# Altium PCB MCU_BOARD.PcbDoc
Units mil, origin at the board's own origin, x right, y up, seen from the top; angles counter-clockwise.
Board outline 1405 x 1170 mil, 2 copper layers (Top Layer, Bottom Layer); 32 components, 95 nets, 105 pads, 3 vias.
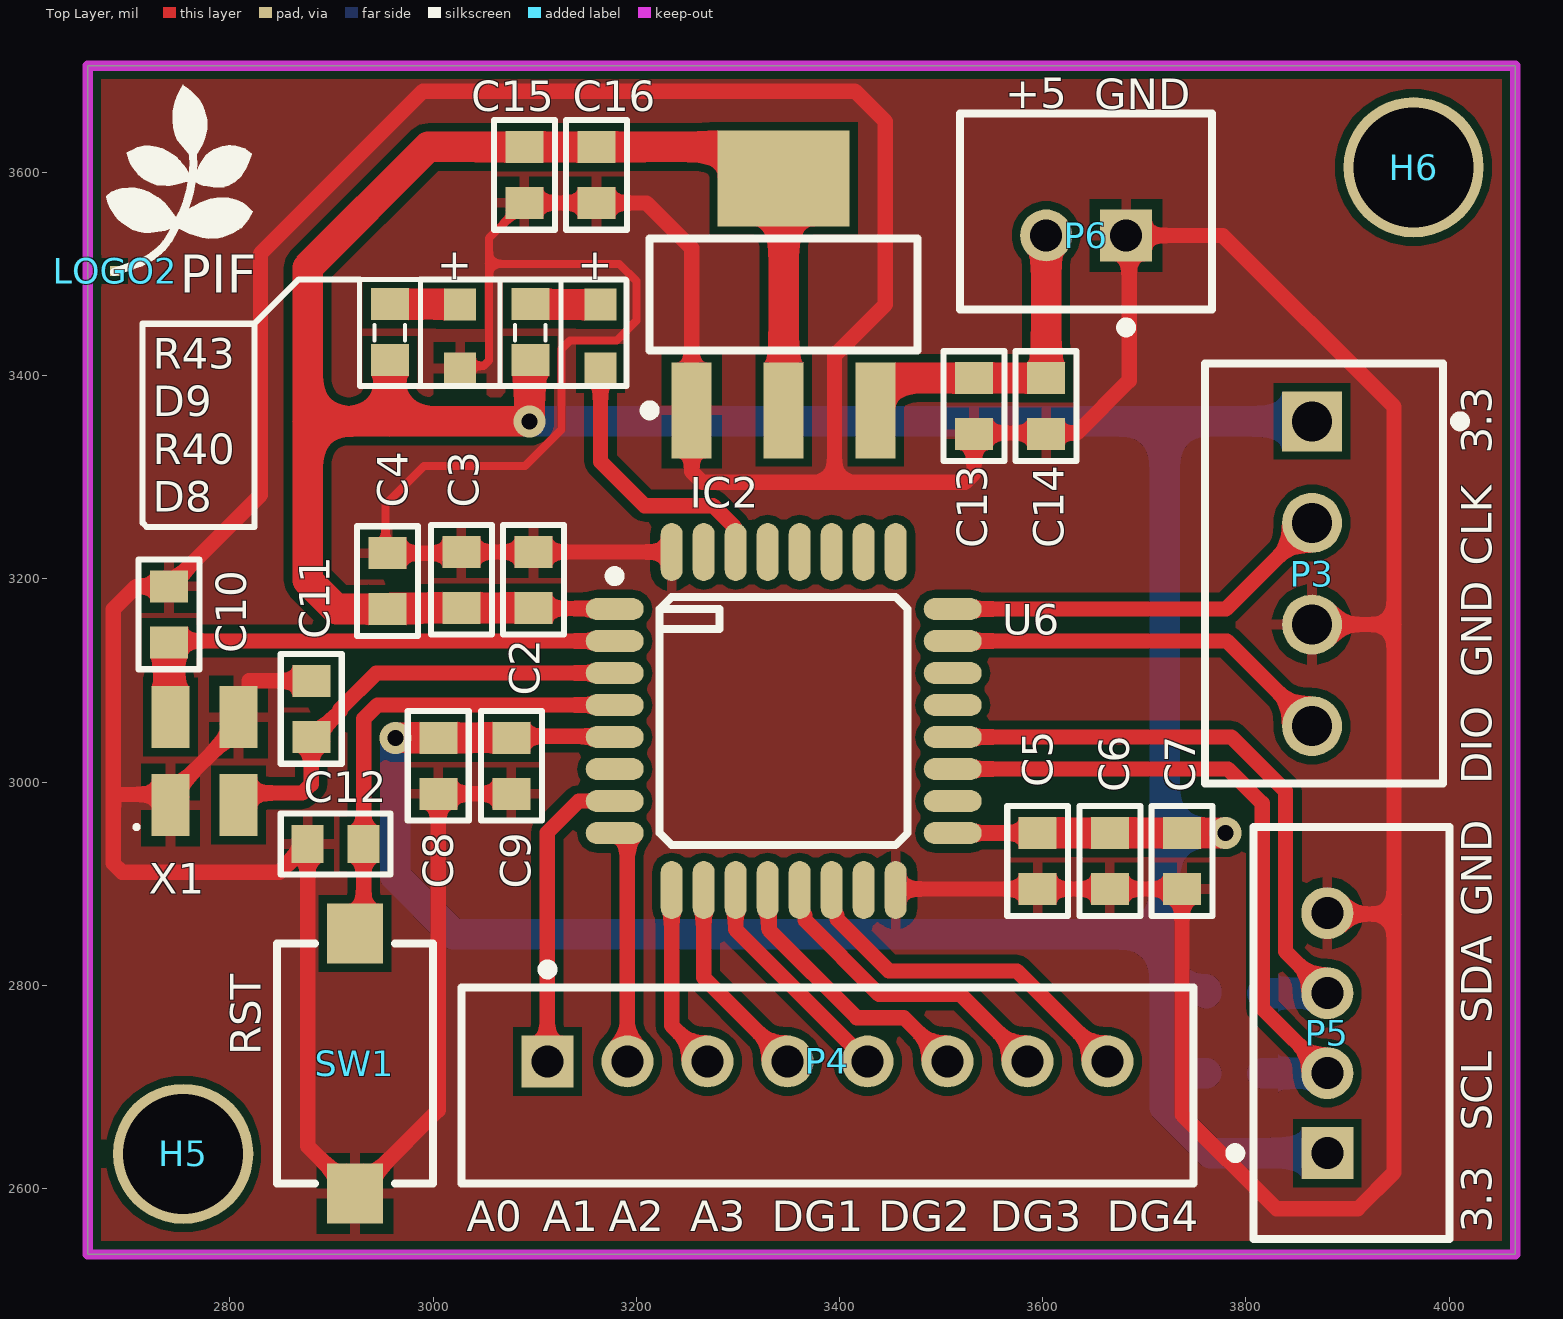
[diagram p0: Top Layer view]
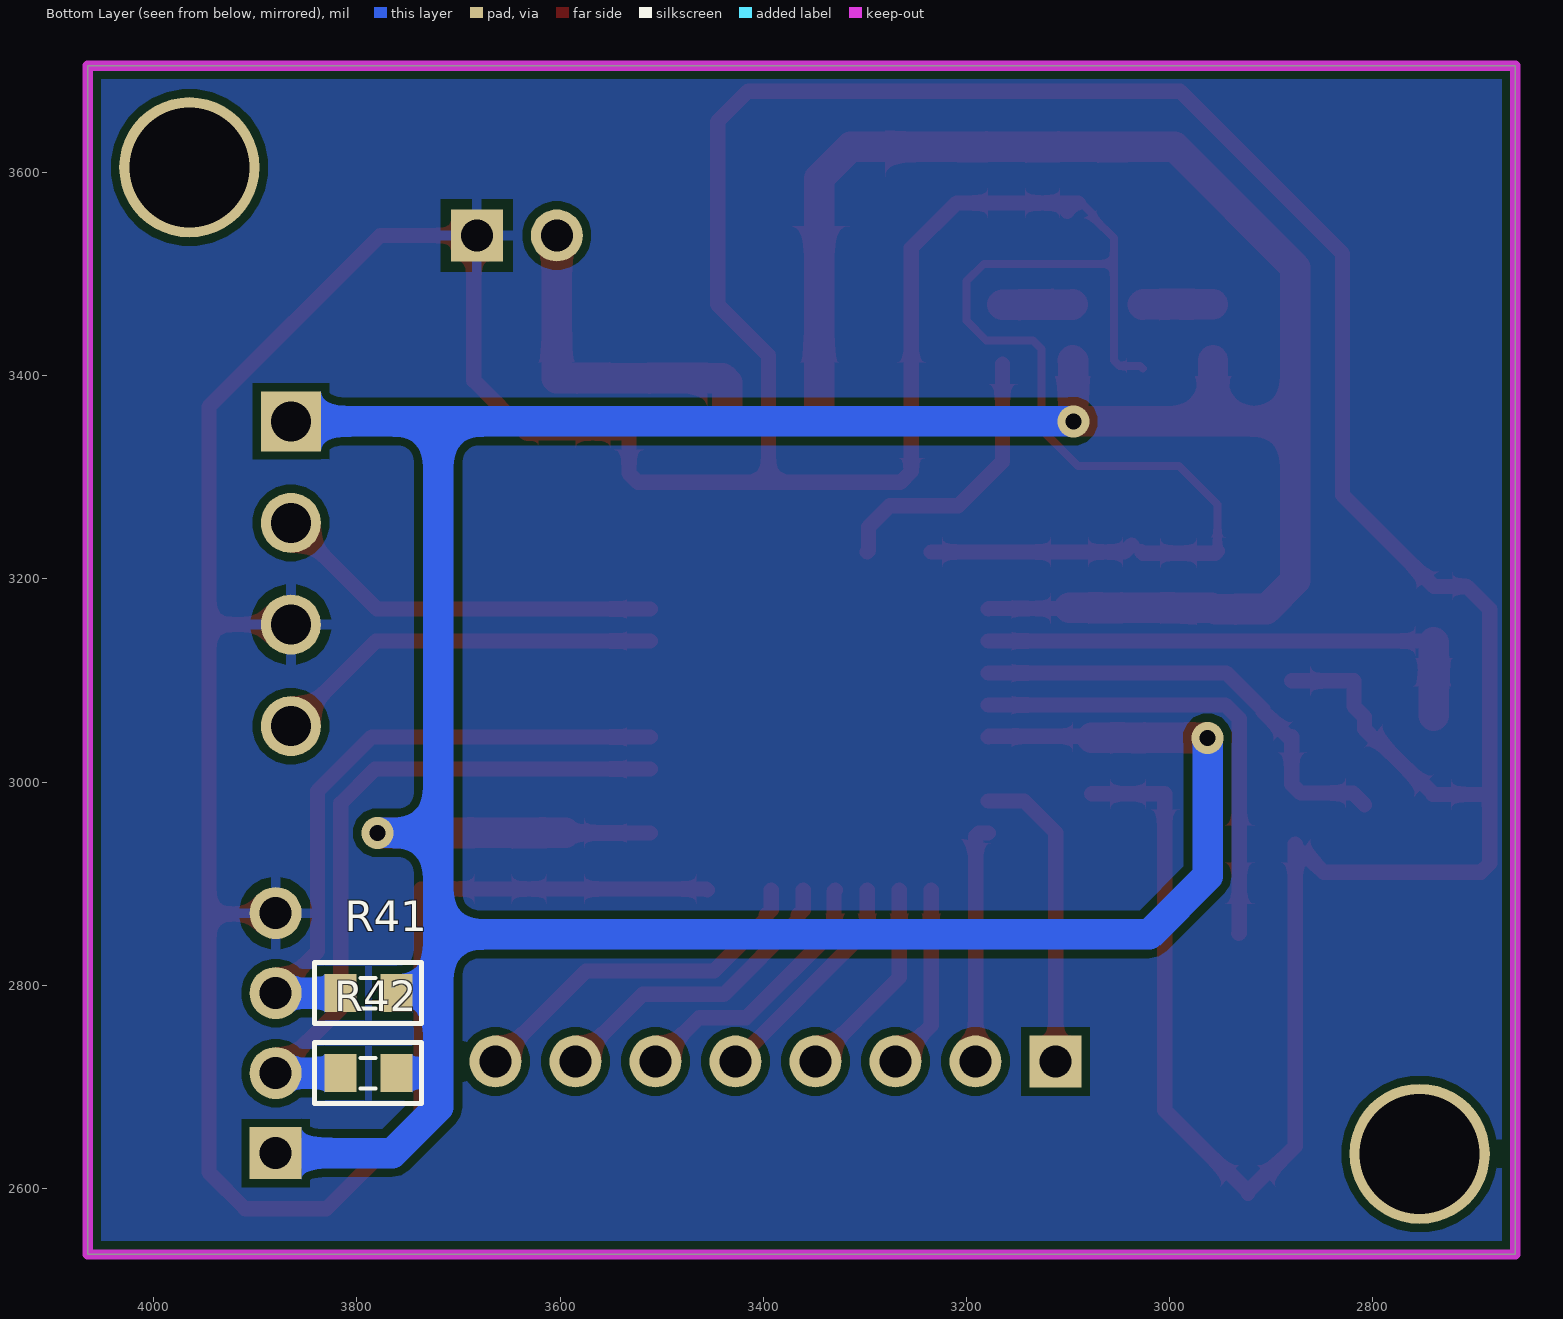
[diagram p1: Bottom Layer view, seen from below]

## Layer stack, top to bottom
Top Solder: solder mask 0.4, Solder Resist, Dk 3.5
Top Layer: signal copper 1.4
Dielectric 1: dielectric 12.6, FR-4, Dk 4.8
Bottom Layer: signal copper 1.4
Bottom Solder: solder mask 0.4, Solder Resist, Dk 3.5

## Board outline
2660,2535 4065,2535 4065,3705 2660,3705

## Design rules (kind name [scope] priority, off if disabled: settings)
Clearance [All] p1: gap=8 ignorepadtopadclearanceinfootprint=FALSE
PolygonConnect [All] p1: connectstyle=Relief reliefconductorwidth=10 reliefentries=4 polygonreliefangle="90 Angle" airgapwidth=10
RoutingVias [All] p1: holewidth=15.75 width=31.5 viastyle="Through Hole" minholewidth=15.75 minwidth=31.5 maxholewidth=15.75 maxwidth=31.5
SolderMaskExpansion [All] p1: expansion=4 istentingtop=FALSE
Width [All] p1: maxlimit=30 minlimit=8 preferedwidth=15
30 further rules are at their usual default settings.

## Components (designator, comment, footprint, x,y, rotation, side; value= is the part's Value field where it differs from the comment)
C2 "Cap Non-Pol SMD" CAP-SM-0603 3098.77,3199 r270 top value="100nF, 16V"
C3 "Cap Non-Pol SMD" CAP-SM-0603 3027.74,3199 r270 top value="100nF, 16V"
C4 "Cap Non-Pol SMD" CAP-SM-0603 2955,3197.7 r270 top value="4.7uF, 16V"
C5 "Cap Non-Pol SMD" CAP-SM-0603 3595,2922.28 r90 top value="100nF, 16V"
C6 "Cap Non-Pol SMD" CAP-SM-0603 3666.03,2922.28 r90 top value="100nF, 16V"
C7 "Cap Non-Pol SMD" CAP-SM-0603 3737.07,2922.28 r90 top value="4.7uF, 16V"
C8 "Cap Non-Pol SMD" CAP-SM-0603 3005,3016 r90 top value="10nF, 16V"
C9 "Cap Non-Pol SMD" CAP-SM-0603 3077,3016 r90 top value="1uF, 16V"
C10 "Cap Non-Pol SMD" CAP-SM-0603 2740,3165 r270 top value="10pF, 16V"
C11 "Cap Non-Pol SMD" CAP-SM-0603 2880.02,3072 r270 top value="10pF, 16V"
C12 "Cap Non-Pol SMD" CAP-SM-0603 2904.02,2939 r0 top value="100nF, 16V"
C13 "Cap Non-Pol SMD" CAP-SM-0603 3532.28,3370 r90 top value="1uF, 16V"
C14 "Cap Non-Pol SMD" CAP-SM-0603 3603.32,3370 r90 top value="100nF, 16V"
C15 "Cap Non-Pol SMD" CAP-SM-0603 3089.74,3597.56 r90 top value="100nF, 16V"
C16 "Cap Non-Pol SMD" CAP-SM-0603 3160.78,3597.56 r90 top value="1uF, 16V"
D8 "Yellow, 2V" WL-SMCW_0603_H=0.7mm 3164.71,3438.46 r90 top
D9 "Yellow, 2V" WL-SMCW_0603_H=0.7mm 3026.54,3438.46 r90 top
H5 "Hole" "LO KHOAN 3MM" 2754,2634 r0 top
H6 "Hole" "LO KHOAN 3MM" 3965,3605 r0 top
IC2 "LM1117" SOT223-4N 3345,3480 r90 top
LOGO2 "LOGO PIF" "PIF LOGO SMALL SSTOP" 2877,3691 r0 top
P3 "61900411121" 61900411121 3876.81,3205 r90 top
P4 "62000811622" 62000811622 3388.11,2701.38 r180 top
P5 "62000411622" 62000411622 3903.62,2752.82 r270 top
P6 "62000211622" 62000211622 3642.69,3561.56 r0 top
R40 "RESISTOR SMD" RES-SM-0603 3095.63,3469.72 r270 top value=1K
R41 "RESISTOR SMD" RES-SM-0603 3761.65,2792.19 r0 bottom value=1K
R42 "RESISTOR SMD" RES-SM-0603 3761.65,2713.45 r0 bottom value=1K
R43 "RESISTOR SMD" RES-SM-0603 2957.46,3469.72 r270 top value=1K
SW1 "434111025826" WS-TASV_L6W3.8H2.5_4341x10258x6 2923,2723 r90 top
U6 "STM32F030K6T6" STM32F030K6T6 3345,3060 r0 top
X1 "XTAL 8MHz" "XTAL 3225" 2775,3020.6 r90 top value=8MHz

## Footprints (in the part's own frame and the unit in brackets; to place one, negate y for a bottom-side part, rotate by r counter-clockwise, add the part's x,y. Pads: shape width x height; smd on the part's side, far side on the other; paste and mask are expansions set on the pad)
61900411121 [mm] "2.54mm Male Locking Header, 4p"
  rect 1.5x1.5 hole 1: 1(3.81,0.3)
  round 1.5 hole 1: 2(1.27,0.3) 3(-1.27,0.3) 4(-3.81,0.3)
  silkscreen extent -5.25,-3.52 5.25,2.98, body extent -5.08,-2.9 5.08,2.9, height 11.53
62000211622 [mm] "2.00mm Male Vertical Shrouded Header, 2p"
  rect 1.3x1.3 hole 0.8: 1(1,-0.6)
  round 1.3 hole 0.8: 2(-1,-0.6)
  silkscreen extent -3.15,-3.02 3.15,2.45, body extent -3,-2.35 3,2.35, height 6.13
62000411622 [mm] "2.00mm Male Vertical Shrouded Header, 4p"
  rect 1.3x1.3 hole 0.8: 1(3,-0.6)
  round 1.3 hole 0.8: 2(1,-0.6) 3(-1,-0.6) 4(-3,-0.6)
  silkscreen extent -5.15,-3.02 5.15,2.45, body extent -5,-2.35 5,2.35, height 6.13
62000811622 [mm] "2.00mm Male Vertical Shrouded Header, 8p"
  rect 1.3x1.3 hole 0.8: 1(7,-0.6)
  round 1.3 hole 0.8: 2(5,-0.6) 3(3,-0.6) 4(1,-0.6) 5(-1,-0.6) 6(-3,-0.6) 7(-5,-0.6) 8(-7,-0.6)
  silkscreen extent -9.15,-3.02 9.15,2.45, body extent -9,-2.35 9,2.35, height 6.13
CAP-SM-0603 [mm] "SMD Ceramic Capacitor Size 0603"
  rect 0.8x0.95 smd: 1(-0.7,0) 2(0.7,0)
  silkscreen extent -1.37,-0.76 1.37,0.76, body extent -0.85,-0.45 0.85,0.45, height 0.6
"LO KHOAN 3MM" [mil]
  round 138 hole 118.1: 1(0,0)
"PIF LOGO SMALL SSTOP" [mil]
  rect 10x10 smd: 1(-190,-188)
  silkscreen extent -199,-189 -55,-5
RES-SM-0603 [mm]
  rect 0.8x0.95 smd: 1(-0.014,0) 2(1.386,0)
  silkscreen extent -0.64,-0.76 2.03,0.76, body extent -0.11,-0.4 1.49,0.4, height 0.3
SOT223-4N [mm] "SOT223, 4-Leads, Body 6.5x3.5mm, Pitch 2.3mm, Lead Span 7mm, IPC Medium Density"
  rect 2.4x1 smd: 1(-2.9,2.3) 2(-2.9,0) 3(-2.9,-2.3)
  rect 2.4x3.3 smd: 4(2.9,0)
  silkscreen extent -3.02,-3.35 1.4,3.47, body extent -3.39,-3.27 3.5,3.23, height 1.72
STM32F030K6T6 [mm] "ARM Cortex M0 Microcontroller IC 32-Bit 48MHz 32KB FLASH, 32-LQFP"
  oval 1.45x0.55 smd: 1(-4.225,2.8) 2(-4.225,2) 3(-4.225,1.2) 4(-4.225,0.4) 5(-4.225,-0.4) 6(-4.225,-1.2) 7(-4.225,-2) 8(-4.225,-2.8) 17(4.225,-2.8) 18(4.225,-2) 19(4.225,-1.2) 20(4.225,-0.4) 21(4.225,0.4) 22(4.225,1.2) 23(4.225,2) 24(4.225,2.8)
  oval 0.55x1.45 smd: 9(-2.8,-4.225) 10(-2,-4.225) 11(-1.2,-4.225) 12(-0.4,-4.225) 13(0.4,-4.225) 14(1.2,-4.225) 15(2,-4.225) 16(2.8,-4.225) 25(2.8,4.225) 26(2,4.225) 27(1.2,4.225) 28(0.4,4.225) 29(-0.4,4.225) 30(-1.2,4.225) 31(-2,4.225) 32(-2.8,4.225)
  silkscreen extent -4.35,-3.1 3.1,3.75, body extent -4.6,-4.6 4.6,4.6, height 1.55
WL-SMCW_0603_H=0.7mm [mm] "SMD Mono-color Chip LED, body 1.6x0.8mm"
  rect 0.8x0.8 smd: 1(-0.8,0) 2(0.8,0)
  body extent -0.8,-0.4 0.8,0.4, height 0.7
WS-TASV_L6W3.8H2.5_4341x10258x6 [mm] "SMD Tact Switch, body 6x3.8mm"
  rect 1.5x1.4 smd: 1(-3.25,0) 2(3.25,0)
  silkscreen extent -3,-1.95 3,1.95, body extent -3.65,-1.95 3.65,1.95, height 2.5
"XTAL 3225" [mm]
  rect 1.55x0.95 smd: 1(-1.1,-0.85) 2(1.1,-0.85) 3(1.1,0.85) 4(-1.1,0.85)
  silkscreen extent -1.7,1.65 -1.6,1.75, body extent -1.6,-1.25 1.6,1.25, height 0.55

## Part data
C2 C3 C4 C5 C6 C7 C8 C9 C10 C11 C12 C13 C14 C15 C16: "Capacitor"
D8 D9: library part 150060YS75000, "WL-SMCW SMT Mono-color Chip LED Waterclear, size 0603, Yellow, 2V, 140deg", Emitting Color=Yellow, Forward Voltage typ.=2V, Operating Temperature="-40 to +85degC", Chip Technology=AlInGaP, ComponentLink1Description=Manufacturer, ComponentLink1URL=http://www.we-online.de, ComponentLink2Description=Datasheet, ComponentLink2URL=https://www.we-online.com/catalog/datasheet/150060YS75000.pdf, Dominant Wavelength typ.=590nm, Luminous Intensity typ.=120mcd, Mounting Technology=SMT, Packaging="Tape and Reel", Part Number=150060YS75000, Peak Wavelength typ.=595nm, Published Date="December 2019", Publisher="Wurth Elektronik", Size=0603, Viewing Angle=140deg
H5 H6: "Hole 3mm"
IC2: "Available in 1.8V, 2.5V, 2.85V, 3.3V, 5V, and  Adjustable Versions"
P3: "WR-WTB THT Male Vertical Locking Header, pitch 2.54mm, 4p", Contact Resistance=20mOhm, Operating Temperature="-40 to +105degC", Rated Current=3A, Withstanding Voltage=1000VAC, Working Voltage=250VAC, ComponentLink1Description=Manufacturer, ComponentLink1URL=http://www.we-online.de, ComponentLink2Description=Datasheet, ComponentLink2URL=https://www.we-online.com/catalog/datasheet/61900411121.pdf, Gender=Male, Mounting Technology=THT, Packaging=Bag, Part Number=61900411121, Pin Number=4, Pitch=2.54mm, Published Date="January 2020", Publisher="Wurth Elektronik", Type=Vertical
P4: "WR-WTB Male Vertical Shrouded Header, pitch 2mm, 8p", Contact Resistance=20mOhm, Operating Temperature="-25 to +85degC", Rated Current=2A, Withstanding Voltage=800VAC, Working Voltage=125VAC, ComponentLink1Description=Manufacturer, ComponentLink1URL=http://www.we-online.de, ComponentLink2Description=Datasheet, ComponentLink2URL=https://www.we-online.com/catalog/datasheet/62000811622.pdf, Gender=Male, Mounting Technology=THT, Packaging=Bag, Part Number=62000811622, Pin Number=8, Pitch=2mm, Published Date="January 2020", Publisher="Wurth Elektronik", Type=Vertical
P5: "WR-WTB Male Vertical Shrouded Header, pitch 2mm, 4p", Contact Resistance=20mOhm, Operating Temperature="-25 to +85degC", Rated Current=2A, Withstanding Voltage=800VAC, Working Voltage=125VAC, ComponentLink1Description=Manufacturer, ComponentLink1URL=http://www.we-online.de, ComponentLink2Description=Datasheet, ComponentLink2URL=https://www.we-online.com/catalog/datasheet/62000411622.pdf, Gender=Male, Mounting Technology=THT, Packaging=Bag, Part Number=62000411622, Pin Number=4, Pitch=2mm, Published Date="January 2020", Publisher="Wurth Elektronik", Type=Vertical
P6: "WR-WTB Male Vertical Shrouded Header, pitch 2mm, 2p", Contact Resistance=20mOhm, Operating Temperature="-25 to +85degC", Rated Current=2A, Withstanding Voltage=800VAC, Working Voltage=125VAC, ComponentLink1Description=Manufacturer, ComponentLink1URL=http://www.we-online.de, ComponentLink2Description=Datasheet, ComponentLink2URL=https://www.we-online.com/catalog/datasheet/62000211622.pdf, Gender=Male, Mounting Technology=THT, Packaging=Bag, Part Number=62000211622, Pin Number=2, Pitch=2mm, Published Date="January 2020", Publisher="Wurth Elektronik", Type=Vertical
R40 R41 R42 R43: "Resistor"
SW1: "WS-TASV SMT Tact Switch, 12VDC, 50mA, 260g, height 2.5mm", Actuator Color=White, Manufacturer="Wurth Elektronik", Operating Temperature max.=85C, Operating Temperature min.=-40C, Rated Current=50mA, Rated Voltage=12V, ComponentLink1Description="Manufacturer Link", ComponentLink1URL=http://www.we-online.de, ComponentLink2Description=Datasheet, ComponentLink2URL=https://www.we-online.com/catalog/datasheet/434111025826.pdf, Contact Material="Stainless Steel", Contact Plating=Silver, Electrical Life=30000Cycles, Height=2.5mm, Length=6mm, Manufacturer Part Number=434111025826, Mounting Technology=SMT, Operation Force=260g, Packaging="Tape and Reel", Terminal Material="Copper Alloy", Terminal Plating=Silver, Washable=No, Width=3.8mm
U6: "ARM Cortex M0 Microcontroller IC 32-Bit 48MHz 32KB FLASH, 32-LQFP", Mfr=STMicroelectronics, Package / Case=32-LQFP, Connectivity="I²C, SPI, UART/USART", Number of I/O=26, Peripherals="DMA, POR, PWM, WDT", Program Memory Size="32KB (32K x 8)", Program Memory Type1=FLASH, Speed=48MHz
X1: library part XTAL

## Via types
v1: diameter 31.5, hole 15.75, Top Layer to Bottom Layer, 3 vias

## Nets (pads, with @x,y where several pads share a name; then routed paths per layer and width w, separated by ;. In a path a pad name is that pad's centre, name@x,y a point inside that pad or via, vN(x,y) a via of type N, cw(c..) or ccw(c..) an arc to the next point about the centre after c; other vN are vias at no path point)
+3.3: C2.2 C3.2 C4.2 C5.2 C6.2 C7.2 C8.2 C9.2 C15.2 C16.2 IC2.2 IC2.4 P3.1 P5.1 R40.2 R41.1 R42.1 R43.2 U6.1 U6.5 U6.17 | length 4871.3
  Top Layer w15: C9.2 3078.44,3045 3177.91,3045 U6.5 ; C2.2@3113.06,3170.71 3178.19,3170.71 U6.1 ; U6.17 3511.42,2949.84 C5.2
  Top Layer w30: C4.2 2904.86,3170.14 2876.35,3198.65 2876.35,3355 ; R43.2 2957.46,3355 ; C4.2@2959.25,3171.44 C3.2 C2.2 ; v1(2962.82,3043.56) C8.2 C9.2 ; C15.2 2995.12,3625.12 2876.35,3506.35 2876.35,3355 ; C15.2@3092.7,3625.12 C16.2 3314.06,3625.12 IC2.4 IC2.2 ; R40.2 3095,3414.53 v1(3095,3355) 2957.46,3355 ; C5.2 3595.16,2950 v1(3780,2950) ; 2876.35,3355 2957.46,3355
  Bottom Layer w30: v1(2962.82,3043.56) 2962.82,2907.18 3020,2850 3720,2850 ; v1(3095,3355) 3720,3355 ; 3720,2795.9 3760.34,2795.9 3761.09,2795.15 R41.1 ; R42.1 3721.55,2713.45 3720,2715 ; v1(3780,2950) 3720,2950 ; P3.1 3720,3355 ; P5.1 3765.29,2634.71 3720,2680 3720,2715 ; 3720,2715 3720,2850 ; 3720,2850 3720,2950 ; 3720,2950 3720,3355
+5: C13.2 C14.2 IC2.3 P6.2 | length 334.2
  Top Layer w30: IC2.3 3435.55,3392.87 3440.24,3397.56 C13.2 C14.2@3600.36,3397.56 ; C14.2 P6.2
BIT_A: 
BIT_A0: P4.1 U6.7 | length 304.5
  Top Layer w15: P4.1@3112.26,2725 3112.26,2950.26 3143.26,2981.26 U6.7
BIT_A1: P4.2 U6.8 | length 235.3
  Top Layer w15: U6.8 3187.93,2949.76 3191,2946.69 P4.2@3191,2725
BIT_A2: P4.3 U6.9 | length 183.3
  Top Layer w15: U6.9 3234.76,2760.24 P4.3
BIT_A3: P4.4 U6.10 | length 202.8
  Top Layer w15: U6.10 3266.26,2807.48 P4.4
BIT_B: 
BIT_C: 
BIT_D: 
DIGIT_1: P4.5 U6.11 | length 222.4
  Top Layer w15: U6.11 3297.76,2854.72 P4.5
DIGIT_2: P4.6 U6.12 | length 269
  Top Layer w15: U6.12 3330.53,2892.39 3330.53,2854.48 3417.01,2768 3463.22,2768 P4.6
DIGIT_3: P4.7 U6.13 | length 308.4
  Top Layer w15: U6.13 3360.75,2874.14 3365.92,2868.98 3365.92,2864.01 3438.93,2791 3518.96,2791 P4.7
DIGIT_4: P4.8 U6.14 | length 355.1
  Top Layer w15: U6.14 3392.24,2874.14 3397.41,2868.98 3397.41,2865.04 3448.45,2814 3574.7,2814 P4.8
GND: C2.1 C3.1 C4.1 C5.1 C6.1 C7.1 C8.1 C9.1 C10.1 C11.1 C12.1 C13.1 C14.1 C15.1 C16.1 D9.1 IC2.1 P3.3 P5.4 P6.1 SW1.1 U6.16 U6.32 X1.2 X1.4 | length 7218.7
  Top Layer w8: C4.1@2953,3227.26 2953,3273 2991,3311 3090.24,3311 3126.33,3347.09 3126.33,3426.33 3134.71,3434.71 3180.65,3434.71 3200,3454.06 3200,3493.11 3183.11,3510 3055,3510 ; D9.1 3029.19,3409.61 3049.61,3409.61 3055,3415 3055,3510 ; C15.1 3086.79,3570 3075.04,3558.25 3075.04,3555.3 3055,3535.26 3055,3510
  Top Layer w15: C12.1 C12.1@2876.46,2936.05 ; C11.1 2818.79,3099.56 2818.79,3074.23 X1.2 2808.46,3052.09 2797.26,3040.89 2794.6,3040.89 2754.01,3000.3 2752.74,3000.3 2741.54,2989.1 2741.54,2987.83 2687.83,2987.83 2685,2985 ; SW1.1 SW1.1@2923,2597.02 ; C4.1@2953,3227.26 C4.1 3026.44,3225.26 C3.1 ; C3.1@3037.47,3233.34 3044.47,3226.34 U6.32 ; C9.1 C8.1 3005,2677.05 2945.03,2617.07 2943.06,2617.07 SW1.1@2923,2597.02 ; C15.1 C15.1@3092.7,3570 ; C15.1@3100.94,3561.75 C15.1@3092.7,3570 ; U6.16 3456.3,2894.72 C5.1 C6.1 C7.1 3737.07,2672.93 3830,2580 3910,2580 3945.6,2615.6 3945.6,2870 ; P3.3 3945.6,3155 ; P5.4@3880.93,2870 3945.6,2870 ; 2685,2985 2685,2920.05 2693.79,2911.26 2848.72,2911.26 2865.26,2927.8 2868.21,2927.8 C12.1@2876.46,2936.05 ; 2685,2985 2685,3170 2707.56,3192.56 C10.1 2830,3282.56 2830,3520 2990,3680 3415,3680 3445,3650 3445,3470 3395,3420 3395,3295 ; C12.1@2876.46,2936.05 2876.46,2641.59 2900.97,2617.07 2902.94,2617.07 SW1.1@2923,2597.02 ; C15.1@3092.7,3570 C16.1 3210,3570 3254.45,3525.55 IC2.1 3254.45,3305.55 3265,3295 3395,3295 ; 3395,3295 3523.5,3295 3532.28,3303.79 C13.1 3532.28,3343.51 3633.51,3343.51 3685,3395 3685,3537.94 3777.06,3537.94 3945.6,3369.4 3945.6,3155 ; 3945.6,2870 3945.6,3155
I2C_SCL: P5.2 R42.2 U6.19 | length 674.5
  Top Layer w15: U6.19 3782.24,3012.76 3815.91,2979.09 3815.91,2777.55 P5.2
  Bottom Layer w30: R42.2 P5.2
I2C_SDA: P5.3 R41.2 U6.20 | length 629.3
  Top Layer w15: U6.20 3785.75,3044.25 3838.91,2991.09 3838.91,2833.29 P5.3
  Bottom Layer w30: R41.2 P5.3
LIFE_SIGNAL: D8.1 U6.30 | length 279.7
  Top Layer w15: D8.1@3164.71,3411.38 3164.71,3315.29 3208,3272 3275.55,3272 3296.48,3251.06 3296.48,3227.61 U6.30
NetC1_1: 
NetD1_1: 
NetD3_2: 
NetD3_3: 
NetD3_4: 
NetD3_6: 
NetD3_7: 
NetD3_9: 
NetD3_10: 
NetD4_2: 
NetD4_3: 
NetD4_4: 
NetD4_6: 
NetD4_7: 
NetD4_9: 
NetD4_10: 
NetD5_2: 
NetD5_3: 
NetD5_4: 
NetD5_6: 
NetD5_7: 
NetD5_9: 
NetD5_10: 
NetD6_2: 
NetD6_3: 
NetD6_4: 
NetD6_6: 
NetD6_7: 
NetD6_9: 
NetD6_10: 
NetD7_K: 
NetD8_2: D8.2 R40.1 | length 69.2
  Top Layer w30: R40.1 3095.95,3469.96 D8.2
NetD9_2: D9.2 R43.1 | length 69.2
  Top Layer w30: R43.1 3026.23,3470.28 D9.2
NetIC1_3: 
NetIC1_7: 
NetP1_1: 
NetP1_2: 
NetP1_3: 
NetP1_4: 
NetP1_5: 
NetP1_6: 
NetP1_7: 
NetP1_8: 
NetR4_2: 
NetR5_2: 
NetR6_2: 
NetR7_2: 
NetR8_2: 
NetR9_2: 
NetR10_2: 
NetR11_2: 
NetR12_2: 
NetR13_2: 
NetR14_2: 
NetR15_2: 
NetR16_2: 
NetR17_2: 
NetR18_2: 
NetR19_2: 
NetR20_2: 
NetR21_2: 
NetR22_2: 
NetR23_2: 
NetR24_2: 
NetR25_2: 
NetR26_2: 
NetR27_2: 
NetR28_2: 
NetR29_2: 
NetR30_2: 
NetR31_2: 
NRST: C12.2 SW1.2 U6.4 | length 463.1
  Top Layer w15: C12.2 2931.58,2851.42 SW1.2@2932,2851 ; C12.2@2931.58,2940 2931.58,3062.22 2945.1,3075.75 U6.4
OSC_IN: C10.2 U6.2 X1.3 | length 511.2
  Top Layer w15: C10.2 2741.3,3138.74 U6.2
  Top Layer w30: X1.3@2740,3065.44 C10.2
OSC_OUT: C11.2 U6.3 X1.1 | length 452.7
  Top Layer w15: X1.1 2808.46,2977.9 2819.67,2989.1 2871.23,2989.1 2880.02,2997.89 C11.2 2882.97,3044.44 2908.58,3070.05 2908.58,3071.75 2944.07,3107.24 U6.3
SWCLK: P3.2 U6.24 | length 388.8
  Top Layer w15: U6.24 3780.24,3170.24 P3.2
SWDIO: P3.4 U6.23 | length 388.3
  Top Layer w15: U6.23 3781.26,3138.74 P3.4
VCC7-20V: 
pads on no net: H5.1 H6.1 LOGO2.1 U6.6 U6.15 U6.18 U6.21 U6.22 U6.25 U6.26 U6.27 U6.28 U6.29 U6.31

## Polygon pours and split planes (outlines as drawn)
GND on Top Layer "GND_L01_P000" (solid, remove dead copper, pour order 0): 2660,2535 4065,2535 4065,3705 2660,3705
GND on Bottom Layer "GND_L02_P001" (solid, remove dead copper, pour order 1): 2660,2535 4065,2535 4065,3705 2660,3705

## Keep-outs
Keep-Out Layer:
  the board outline again, w10

## Silkscreen, mask and mechanical layers (free items; w line width, h text height)
Top Overlay:
  lines w6: 2927.93,3389.72 3190.3,3389.72 3190.3,3493.58 3189.17,3494.72 3066.1,3494.72 2986.99,3494.72 ; 2927.93,3494.72 2867.72,3494.72 2824,3451 ; 2824,3451 2714,3451 2714,3255 2718,3251 2824,3251 2824,3451
  text "+5" at 3563,3663 h30
  text "GND" at 3650.69,3662.08 h30
  text "3.3" at 4042,3323 h30 r90
  text "CLK" at 4042,3213 h30 r90
  text "GND" at 4042,3103 h30 r90
  text "DIO" at 4042,2998 h30 r90
  text "GND" at 4042,2868 h30 r90
  text "SDA" at 4042,2762.42 h30 r90
  text "RST" at 2830.35,2731 h30 r90
  text "SCL" at 4042,2656.84 h30 r90
  text "A0" at 3033,2558 h30
  text "A1" at 3108,2558 h30
  text "A2" at 3173,2558 h30
  text "A3" at 3253,2558 h30
  text "DG1" at 3333,2558 h30
  text "DG2" at 3438,2558 h30
  text "DG3" at 3548,2558 h30
  text "DG4" at 3663,2558 h30
  text "3.3" at 4042,2556.25 h30 r90

## Text inside footprints (layer, text, board x,y; h text height)
D8: Top Overlay "+" at 3176.53,3521.14 h30 r180
D9: Top Overlay "+" at 3038.36,3521.14 h30 r180
LOGO2: Top Overlay "PIF" at 2750.43,3481.47 h37.5